# Altium PCB Disp.PcbDoc
Units mm, origin at the board's own origin, x right, y up, seen from the top; angles counter-clockwise.
Board outline 152.4 x 101.6 mm, 2 copper layers (Top Layer, Bottom Layer); 12 components, 44 nets, 130 pads, 6 vias.
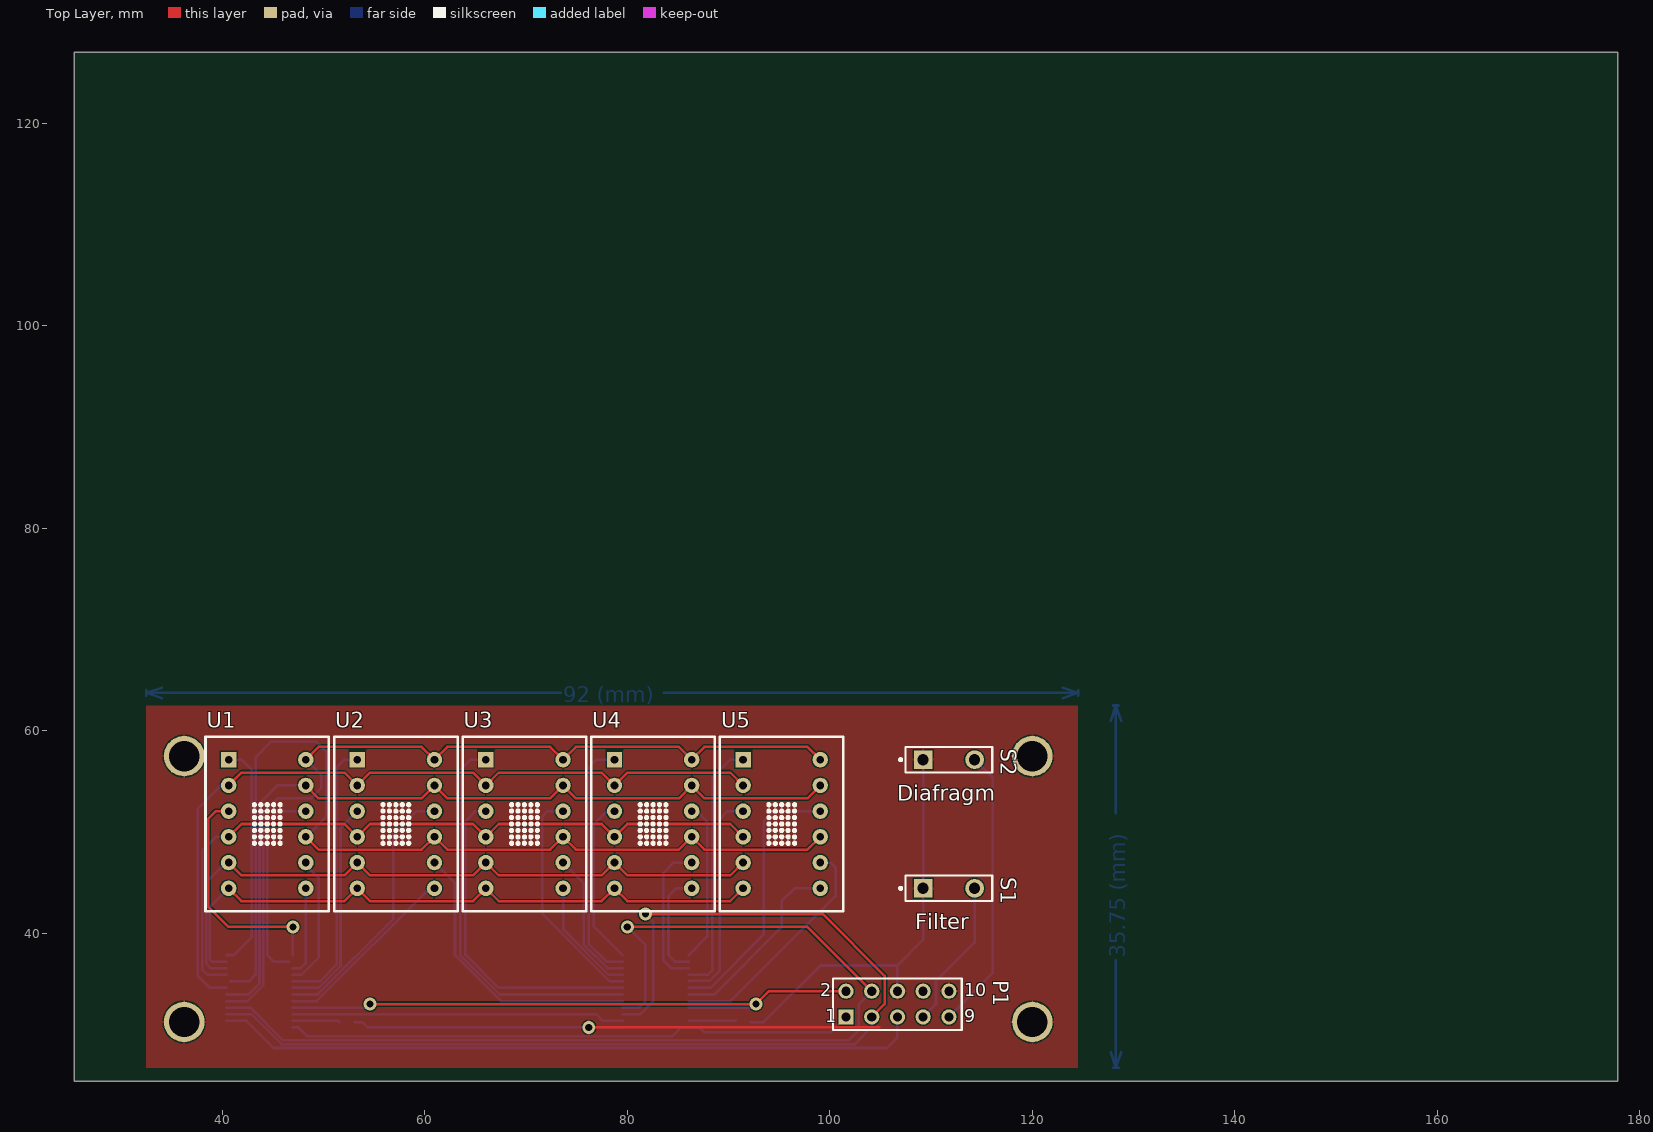
[diagram p0: Top Layer view]
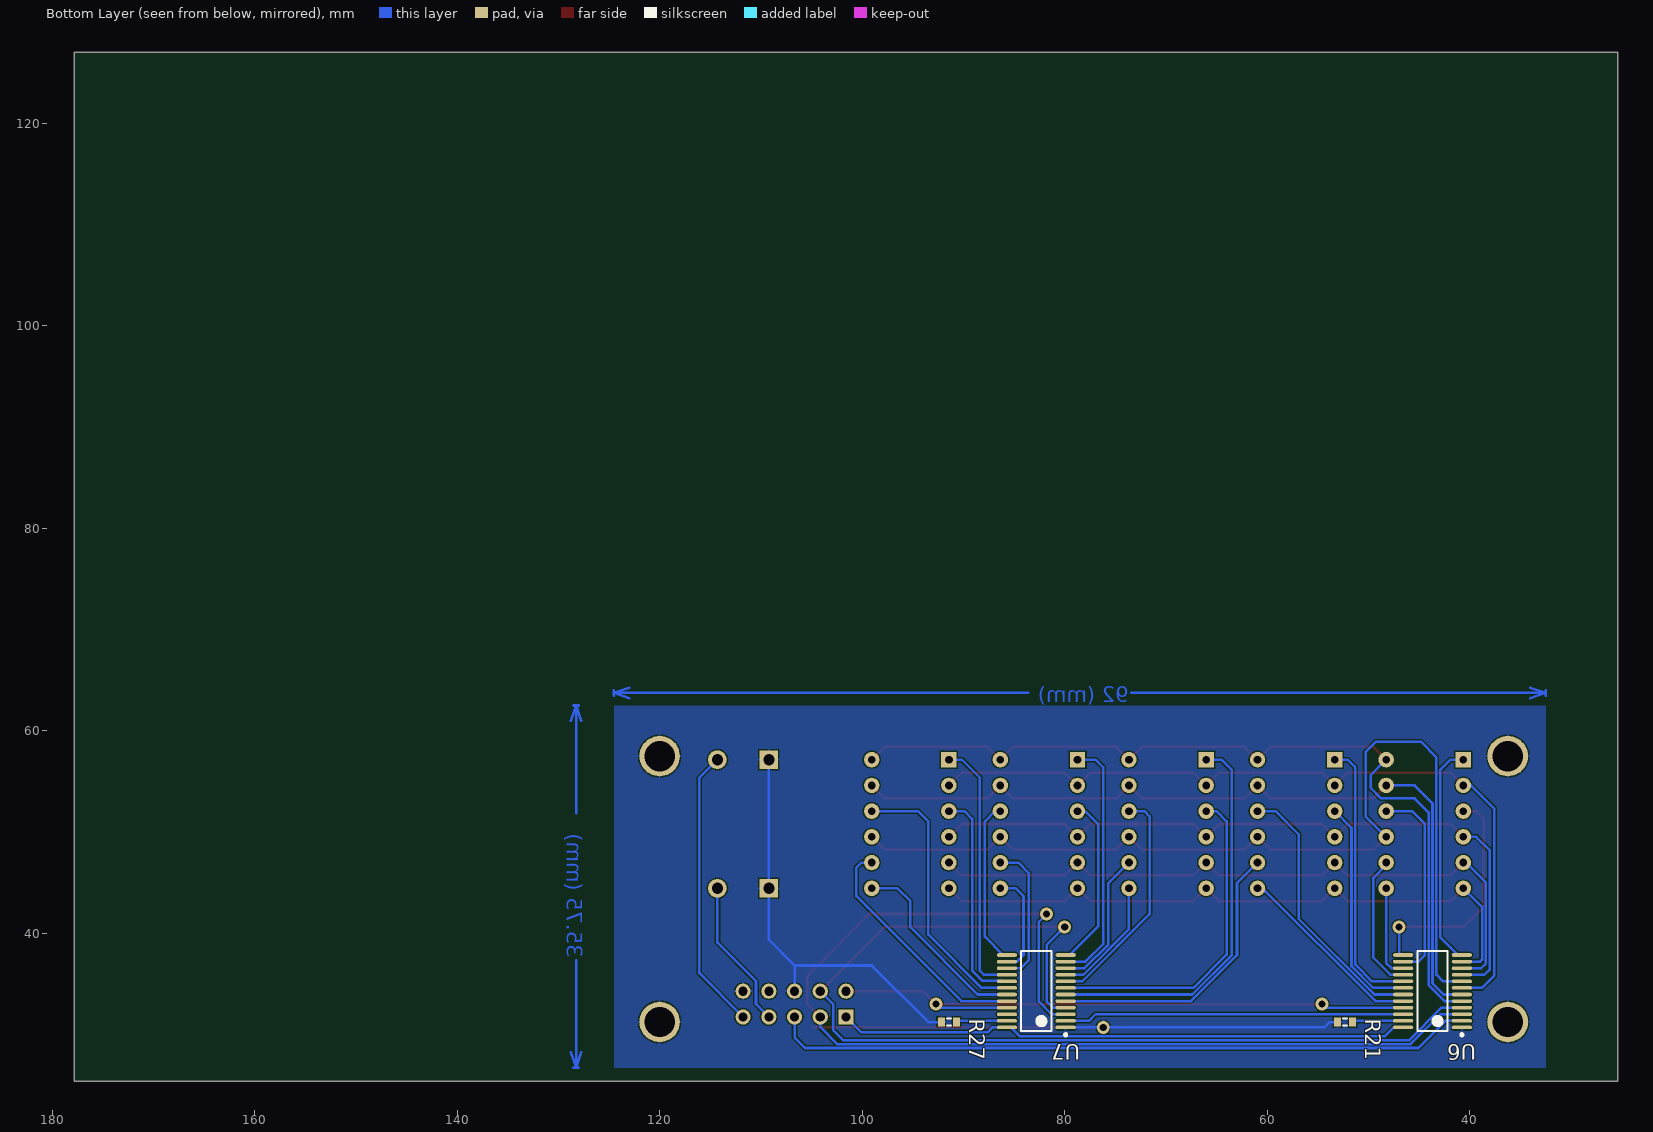
[diagram p1: Bottom Layer view, seen from below]

## Layer stack, top to bottom
Top Layer: signal copper 0.0356
Dielectric: dielectric 0.32, FR-4, Dk 4.8
Bottom Layer: signal copper 0.0356

## Board outline
25.4,25.4 177.8,25.4 177.8,127 25.4,127

## Design rules (kind name [scope] priority, off if disabled: settings)
Clearance [All] p1: gap=0.127
PolygonConnect [All] p1: connectstyle=Relief reliefconductorwidth=0.254 reliefentries=4 polygonreliefangle="90 Angle"
RoomDefinition Display [InComponentClass('Display')] p1: confinementstyle=ConfineOut formatcopy=TRUE lockcomponents=FALSE outline 39.37,121.92 157.988,121.92 157.988,142.494 39.37,142.494
RoutingVias [All] p1: holewidth=0.711 width=1.27 viastyle="Through Hole" minholewidth=0.711 minwidth=1.27 maxholewidth=0.711 maxwidth=1.27
SilkscreenOverComponentPads [All] p1: minsilkscreentomaskgap=0.254
SolderMaskExpansion [All] p1: expansion=0.102
Width [All] p1: maxlimit=2.54 minlimit=0.254 preferedwidth=0.254
27 further rules are at their usual default settings.

## Components (designator, comment, footprint, x,y, rotation, side; value= is the part's Value field where it differs from the comment)
P1 "Header 5X2" HDR2X5 101.6,31.75 r0 top (schematic designator P?)
R21 "Res3" RESC1608L 52.324,31.242 r180 bottom
R27 "Res3" RESC1608L 91.44,31.242 r180 bottom
S1 "SW-PB" SPST-2 111.76,44.45 r0 top
S2 "SW-PB" SPST-2 111.76,57.15 r0 top locked
U1 "BL-M07A571" "LED matrix 7x5" 40.64,57.15 r0 top locked (schematic designator *3)
U2 "BL-M07A571" "LED matrix 7x5" 53.34,57.15 r0 top locked (schematic designator *4)
U3 "BL-M07A571" "LED matrix 7x5" 66.04,57.15 r0 top locked (schematic designator *5)
U4 "BL-M07A571" "LED matrix 7x5" 78.74,57.15 r0 top locked (schematic designator *6)
U5 "BL-M07A571" "LED matrix 7x5" 91.44,57.15 r0 top locked (schematic designator *8)
U6 "STP16C596" TSOP65P640-24AM 43.688,34.29 r0 bottom locked (schematic designator *2)
U7 "STP16C596" TSOP65P640-24AM 82.809,34.288 r0 bottom (schematic designator *7)

## Footprints (in the part's own frame and the unit in brackets; to place one, negate y for a bottom-side part, rotate by r counter-clockwise, add the part's x,y. Pads: shape width x height; smd on the part's side, far side on the other; paste and mask are expansions set on the pad)
HDR2X5 [mm] "Connector; Header; 5x2 Position"
  rect 1.5x1.5 hole 0.9: 1(0,0)
  round 1.5 hole 0.9: 2(0,2.54) 3(2.54,0) 4(2.54,2.54) 5(5.08,0) 6(5.08,2.54) 7(7.62,0) 8(7.62,2.54) 9(10.16,0) 10(10.16,2.54)
  silkscreen extent -1.27,-1.27 11.43,3.81
"LED matrix 7x5" [mil] "LED matrix 7x5"
  rect 60x60 hole 30: 1(0,0)
  round 60 hole 30: 2(0,-100) 3(0,-200) 4(0,-300) 5(0,-400) 6(0,-500) 7(300,-500) 8(300,-400) 9(300,-300) 10(300,-200) 11(300,-100) 12(300,0)
  silkscreen extent -90,-590 390,90, body extent -90,-590 390,90, height 250
RESC1608L [mm] "Chip Resistor, Body 1.6x0.8mm, IPC High Density"
  rect 0.7x0.9 smd: 1(-0.75,0) 2(0.75,0)
  silkscreen extent -0.2,-0.35 0.2,0.35, body extent -0.85,-0.48 0.85,0.48, height 0.9
SPST-2 [mm] "Circuit Breaker; 2 Leads"
  rect 1.85x1.85 hole 1.1: 1(-2.54,0)
  round 1.85 hole 1.1: 2(2.54,0)
  silkscreen extent -4.89,-1.27 4.28,1.27
TSOP65P640-24AM [mm] "TSOP, 24-Leads, Body 7.8x4.4mm, Pitch 0.65mm, IPC Low Density"
  oval 2x0.35 smd: 1(-2.9,3.575) 2(-2.9,2.925) 3(-2.9,2.275) 4(-2.9,1.625) 5(-2.9,0.975) 6(-2.9,0.325) 7(-2.9,-0.325) 8(-2.9,-0.975) 9(-2.9,-1.625) 10(-2.9,-2.275) 11(-2.9,-2.925) 12(-2.9,-3.575) 13(2.9,-3.575) 14(2.9,-2.925) 15(2.9,-2.275) 16(2.9,-1.625) 17(2.9,-0.975) 18(2.9,-0.325) 19(2.9,0.325) 20(2.9,0.975) 21(2.9,1.625) 22(2.9,2.275) 23(2.9,2.925) 24(2.9,3.575)
  silkscreen extent -3.02,-3.95 1.5,4.42, body extent -2.25,-3.95 2.25,3.95, height 1.1

## Part data
P1: "Header, 5-Pin, Dual row"
R21 R27: "Resistor"
S1 S2: "Switch"

## Free pads (board coordinates)
  round 4 hole 3: 0(36.25,31.25) 0(36.25,57.5) 0(120,31.25) 0(120,57.5)

## Via types
v1: diameter 1.27, hole 0.711, Top Layer to Bottom Layer, 6 vias

## Nets (pads, with @x,y where several pads share a name; then routed paths per layer and width w, separated by ;. In a path a pad name is that pad's centre, name@x,y a point inside that pad or via, vN(x,y) a via of type N, cw(c..) or ccw(c..) an arc to the next point about the centre after c; other vN are vias at no path point)
GND: P1.6 P1.10 pad.0 R21.1 R27.1 S1.1 S2.1 U6.1 U7.1 | length 96.1
  Top Layer w0.254: v1(76.2,30.715) 104.883,30.715
  Bottom Layer w0.254: R21.1 53.848,31.242 54.375,30.715 v1(76.2,30.715) U7.1@79.529,30.715 ; R27.1 93.472,31.242 99.06,36.83 106.68,36.83 ; P1.6 106.68,36.83 ; S2.1 S1.1 109.22,39.37 106.68,36.83
Net*2_2: P1.5 U6.2 | length 69.8
  Bottom Layer w0.254: U6.2@40.413,31.365 42.403,31.365 45.085,28.683 105.645,28.683 106.68,29.718 P1.5
Net*2_3: P1.3 U6.3 U7.3 | length 109.9
  Top Layer w0.254: v1(81.788,41.91) 99.314,41.91 105.41,35.814 105.41,33.02 P1.3
  Bottom Layer w0.254: U6.3@40.413,32.015 42.908,32.015 45.859,29.064 102.47,29.064 104.14,30.734 P1.3 ; U7.3@79.529,32.015 81.291,32.015 82.55,33.274 82.55,41.148 v1(81.788,41.91)
Net*2_4: P1.4 U6.4 U7.4 | length 105.9
  Top Layer w0.254: v1(80.01,40.64) 97.79,40.64 P1.4
  Bottom Layer w0.254: U6.4@40.413,32.665 42.797,32.665 46.017,29.445 101.835,29.445 102.87,30.48 102.87,33.02 P1.4 ; U7.4@79.529,32.665 81.179,32.665 81.788,33.274 81.788,38.862 v1(80.01,40.64)
Net*2_5: U1.12 U2.12 U3.12 U4.12 U5.12 U6.5 | length 86.5
  Top Layer w0.254: U1.12 49.53,58.42 59.69,58.42 U2.12 62.23,58.42 72.39,58.42 U3.12 74.93,58.42 85.09,58.42 U4.12 87.63,58.42 97.79,58.42 U5.12
  Bottom Layer w0.254: U6.5@40.413,33.315 42.49,33.315 44.069,34.894 44.069,34.925 44.069,51.943 45.466,53.34 48.768,53.34 49.784,54.356 49.784,55.626 U1.12
Net*2_6: U1.11 U2.11 U3.11 U4.11 U5.11 U6.6 | length 81.8
  Top Layer w0.254: U1.11 49.53,53.34 59.69,53.34 U2.11 62.23,53.34 72.39,53.34 U3.11 74.93,53.34 85.09,53.34 U4.11 87.63,53.34 97.79,53.34 U5.11
  Bottom Layer w0.254: U6.6@40.413,33.965 42.601,33.965 43.688,35.052 43.688,52.832 45.466,54.61 U1.11
Net*2_7: U1.2 U2.2 U3.2 U4.2 U5.2 U6.7 | length 78.8
  Top Layer w0.254: U1.2 41.91,55.88 52.07,55.88 U2.2 54.61,55.88 64.77,55.88 U3.2 67.31,55.88 77.47,55.88 U4.2 80.01,55.88 90.17,55.88 U5.2
  Bottom Layer w0.254: U6.7@40.413,34.615 38.791,34.615 37.592,35.814 37.592,52.324 39.878,54.61 U1.2
Net*2_8: U1.9 U2.9 U3.9 U4.9 U5.9 U6.8 | length 96.5
  Top Layer w0.254: U1.9 49.53,48.26 59.69,48.26 U2.9 62.23,48.26 72.39,48.26 U3.9 74.93,48.26 85.09,48.26 U4.9 87.63,48.26 97.79,48.26 U5.9
  Bottom Layer w0.254: U6.8 42.631,35.265 43.307,35.941 43.307,56.292 43.307,57.389 44.846,58.928 49.276,58.928 50.292,57.912 50.292,51.562 U1.9
Net*2_9: U1.4 U2.4 U3.4 U4.4 U5.4 U6.9 | length 72.5
  Top Layer w0.254: U1.4 41.91,50.8 52.07,50.8 U2.4 54.61,50.8 64.77,50.8 U3.4 67.31,50.8 77.47,50.8 U4.4 80.01,50.8 90.17,50.8 U5.4
  Bottom Layer w0.254: U6.9@40.413,35.915 38.569,35.915 38.029,36.455 38.029,48.189 39.37,49.53 U1.4
Net*2_10: U1.5 U2.5 U3.5 U4.5 U5.5 U6.10 | length 68.2
  Top Layer w0.254: U1.5 41.91,45.72 52.07,45.72 U2.5 54.61,45.72 64.77,45.72 U3.5 67.31,45.72 77.47,45.72 U4.5 80.01,45.72 90.17,45.72 U5.5
  Bottom Layer w0.254: U6.10@40.413,36.565 38.873,36.565 38.41,37.028 38.41,45.014 40.386,46.99 U1.5
Net*2_11: U1.6 U2.6 U3.6 U4.6 U5.6 U6.11 | length 64.5
  Top Layer w0.254: U1.6 41.91,43.18 52.07,43.18 U2.6 54.61,43.18 64.77,43.18 U3.6 67.31,43.18 77.47,43.18 U4.6 80.01,43.18 90.17,43.18 U5.6
  Bottom Layer w0.254: U6.11@40.413,37.215 38.985,37.215 38.791,37.409 38.791,42.601 U1.6
Net*2_12: U1.1 U6.12 | length 22.5
  Bottom Layer w0.254: U6.12@40.413,37.865 41.167,37.865 42.926,39.624 42.926,56.134 41.91,57.15 U1.1
Net*2_13: U1.3 U6.13 | length 23
  Top Layer w0.254: U1.3 39.37,52.07 38.608,51.308 38.608,42.672 40.64,40.64 v1(46.99,40.64)
  Bottom Layer w0.254: U6.13@46.963,37.865 46.963,40.613 v1(46.99,40.64)
Net*2_14: U1.10 U6.14 | length 19.7
  Bottom Layer w0.254: U6.14 45.081,37.215 44.45,37.846 44.45,50.8 45.72,52.07 U1.10
Net*2_15: U1.7 U6.15 | length 8.9
  Bottom Layer w0.254: U6.15@46.963,36.565 47.741,36.565 48.26,37.084 U1.7
Net*2_16: U1.8 U6.16 | length 13.2
  Bottom Layer w0.254: U6.16@46.963,35.915 47.853,35.915 49.53,37.592 49.53,45.466 48.26,46.736 U1.8
Net*2_17: U2.1 U6.17 | length 26.8
  Bottom Layer w0.254: U6.17@46.963,35.265 49.651,35.265 51.308,36.922 51.308,56.388 52.07,57.15 U2.1
Net*2_18: U2.3 U6.18 | length 21.6
  Bottom Layer w0.254: U6.18@46.963,34.615 49.539,34.615 51.689,36.765 51.689,50.419 U2.3
Net*2_19: U2.10 U6.19 | length 26.4
  Bottom Layer w0.254: U6.19@46.963,33.965 49.428,33.965 56.896,41.433 56.896,49.784 59.182,52.07 U2.10
Net*2_20: U2.7 U6.20 | length 18.6
  Bottom Layer w0.254: U6.20@46.963,33.315 49.317,33.315 60.452,44.45 U2.7
Net*2_21: P1.2 U6.21 U7.21 | length 62.1
  Top Layer w0.254: v1(54.61,33.02) v1(92.71,33.02) 93.98,34.29 P1.2
  Bottom Layer w0.254: U6.21@46.963,32.665 54.255,32.665 v1(54.61,33.02) ; U7.21@86.079,32.665 92.355,32.665 v1(92.71,33.02)
Net*2_22: U6.22 U7.2 | length 32.8
  Bottom Layer w0.254: U6.22@46.963,32.015 76.951,32.015 77.601,31.365 U7.2@79.529,31.365
Net*2_23: R21.2 U6.23 | length 4.7
  Bottom Layer w0.254: U6.23@46.963,31.365 51.451,31.365 R21.2
Net*4_8: U2.8 U7.5 | length 28.4
  Bottom Layer w0.254: U2.8 62.992,44.958 62.992,37.846 67.523,33.315 U7.5@79.529,33.315
Net*5_1: U3.1 U7.6 | length 38.9
  Bottom Layer w0.254: U3.1 64.516,57.15 63.5,56.134 63.5,37.877 67.412,33.965 U7.6@79.529,33.965
Net*5_3: U3.3 U7.7 | length 32.5
  Bottom Layer w0.254: U3.3 65.024,52.07 64.008,51.054 64.008,37.908 67.301,34.615 U7.7@79.529,34.615
Net*5_7: U3.7 U7.9 | length 11.8
  Bottom Layer w0.254: U3.7 73.66,40.417 78.162,35.915 U7.9@79.529,35.915
Net*5_8: U3.8 U7.10 | length 13.7
  Bottom Layer w0.254: U3.8 75.692,44.958 75.692,38.924 78.051,36.565 U7.10@79.529,36.565
Net*5_10: U3.10 U7.8 | length 22.5
  Bottom Layer w0.254: U3.10 72.136,52.07 71.628,51.562 71.628,41.91 78.273,35.265 U7.8@79.529,35.265
Net*6_1: U4.1 U7.11 | length 24.3
  Bottom Layer w0.254: U4.1 76.962,57.15 76.2,56.388 76.2,38.954 77.939,37.215 U7.11@79.529,37.215
Net*6_3: U4.3 U7.12 | length 16.7
  Bottom Layer w0.254: U4.3 77.978,52.07 76.708,50.8 76.708,40.686 U7.12@79.529,37.865
Net*6_7: U4.7 U7.14 | length 10.7
  Bottom Layer w0.254: U7.14@86.079,37.215 84.705,37.215 84.074,37.846 84.074,43.688 84.836,44.45 U4.7
Net*6_8: U4.8 U7.15 | length 14.7
  Bottom Layer w0.254: U7.15@86.079,36.565 84.339,36.565 83.566,37.338 83.566,45.974 84.582,46.99 U4.8
Net*6_10: U4.10 U7.13 | length 15.9
  Bottom Layer w0.254: U7.13@86.079,37.865 87.884,39.67 87.884,51.054 86.868,52.07 U4.10
Net*7_16: U5.1 U7.16 | length 25.3
  Bottom Layer w0.254: U7.16@86.079,35.915 87.985,35.915 88.392,36.322 88.392,55.372 90.17,57.15 U5.1
Net*7_17: U5.3 U7.17 | length 21.1
  Bottom Layer w0.254: U7.17@86.079,35.265 86.12,35.306 88.138,35.306 89.154,36.322 89.154,51.308 89.916,52.07 U5.3
Net*7_18: U5.10 U7.18 | length 26.8
  Bottom Layer w0.254: U7.18@86.079,34.615 88.209,34.615 93.472,39.878 93.472,51.054 94.488,52.07 U5.10
Net*7_19: U5.7 U7.19 | length 18.8
  Bottom Layer w0.254: U7.19@86.079,33.965 88.606,33.965 95.25,40.609 95.25,43.18 96.52,44.45 U5.7
Net*7_20: U5.8 U7.20 | length 23.3
  Bottom Layer w0.254: U7.20@86.079,33.315 90.211,33.315 99.481,42.585 100.584,43.688 100.584,46.482 100.076,46.99 U5.8
Net*7_23: R27.2 U7.23 | length 4.6
  Bottom Layer w0.254: U7.23@86.079,31.365 R27.2@90.69,31.365
NetP?_7: P1.7 S1.2 | length 14.8
  Bottom Layer w0.254: P1.7 110.49,33.02 110.49,35.275 114.3,39.085 S1.2
NetP?_8: P1.8 | length 0.3
  Bottom Layer w0.254: P1.8 P1.8@109.22,34.544
NetP?_9: P1.9 S2.2 | length 27.9
  Bottom Layer w0.254: P1.9 116.078,36.068 116.078,55.372 S2.2
VCC: P1.1 U6.24 U7.24 | length 56.5
  Bottom Layer w0.254: U6.24@46.963,30.715 47.517,30.715 48.406,29.826 84.436,29.826 85.325,30.715 U7.24@86.36,30.715 ; U7.24@86.079,30.715 87.141,30.715 87.63,30.226 100.076,30.226 P1.1
pads on no net: U7.22
copper on no net: | length 117.9
  Bottom Layer w0.254: 32.524,63.488 32.524,63.996 ; 34.048,63.234 32.524,63.742 ; 34.048,64.25 32.524,63.742 ; 73.42,63.742 32.524,63.742 ; 83.628,63.742 124.524,63.742 ; 123,63.234 124.524,63.742 ; 123,64.25 124.524,63.742 ; 124.524,63.488 124.524,63.996 ; 127.742,28.274 128.25,26.75 ; 127.742,60.976 128.25,62.5 ; 127.996,26.75 128.504,26.75 ; 127.996,62.5 128.504,62.5 ; 128.25,37.363 128.25,26.75 ; 128.25,51.887 128.25,62.5 ; 128.758,28.274 128.25,26.75 ; 128.758,60.976 128.25,62.5

## Polygon pours and split planes (outlines as drawn)
GND on Top Layer "Bottom Layer-No Net" (solid, pour order 1000): 32.5,62.5 124.5,62.5 124.5,26.75 32.5,26.75
GND on Bottom Layer "Bottom Layer-No Net" (solid, remove dead copper, pour order 1001): 32.5,62.5 124.5,62.5 124.5,26.75 32.5,26.75

## Other copper
Bottom Layer:
  text "92 (mm)" at 73.674,62.828 h1.52
  text "35.75 (mm)" at 129.164,37.617 h1.52 r90

## Silkscreen, mask and mechanical layers (free items; w line width, h text height)
Top Overlay:
  text "Diafragm" at 106.68,53.086 h1.52
  text "Filter" at 108.458,40.386 h1.52

## Text inside footprints (layer, text, board x,y; h text height)
P1: Top Overlay "2" at 99.06,33.782 h1.27; Top Overlay "1" at 99.568,31.242 h1.27; Top Overlay "9" at 113.284,31.242 h1.27; Top Overlay "10" at 113.284,33.782 h1.27